# Altium PCB BOOST.PcbDoc
Units mm, origin at the board's own origin, x right, y up, seen from the top; angles counter-clockwise.
Board outline 86.99 x 34.8 mm, 2 copper layers (Top Layer, Bottom Layer), stack 1.581 mm thick; 13 components, 7 nets, 30 pads, 24 vias.
Unrouted connection lines stored in the file: 1.
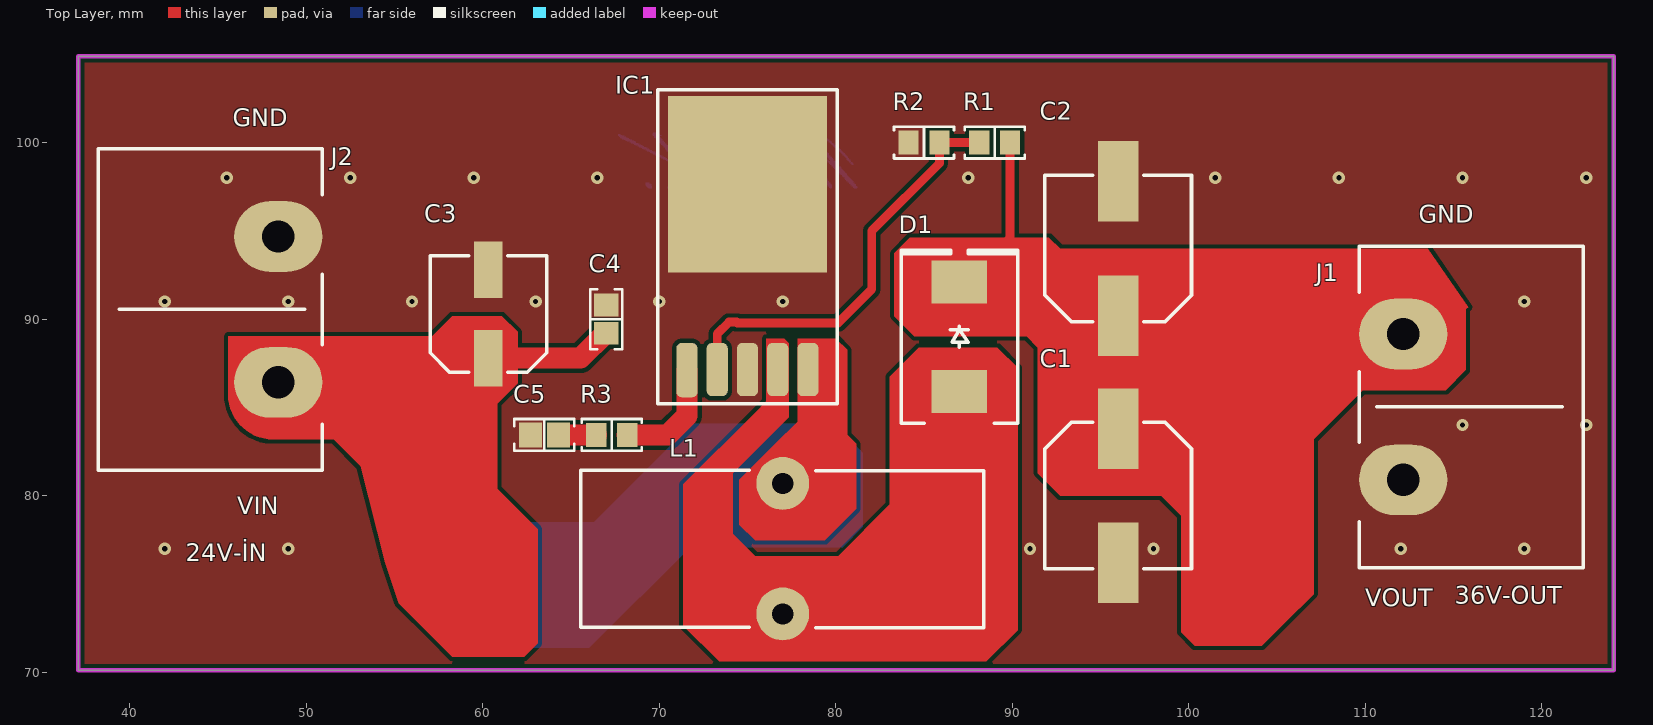
[diagram p0: Top Layer view]
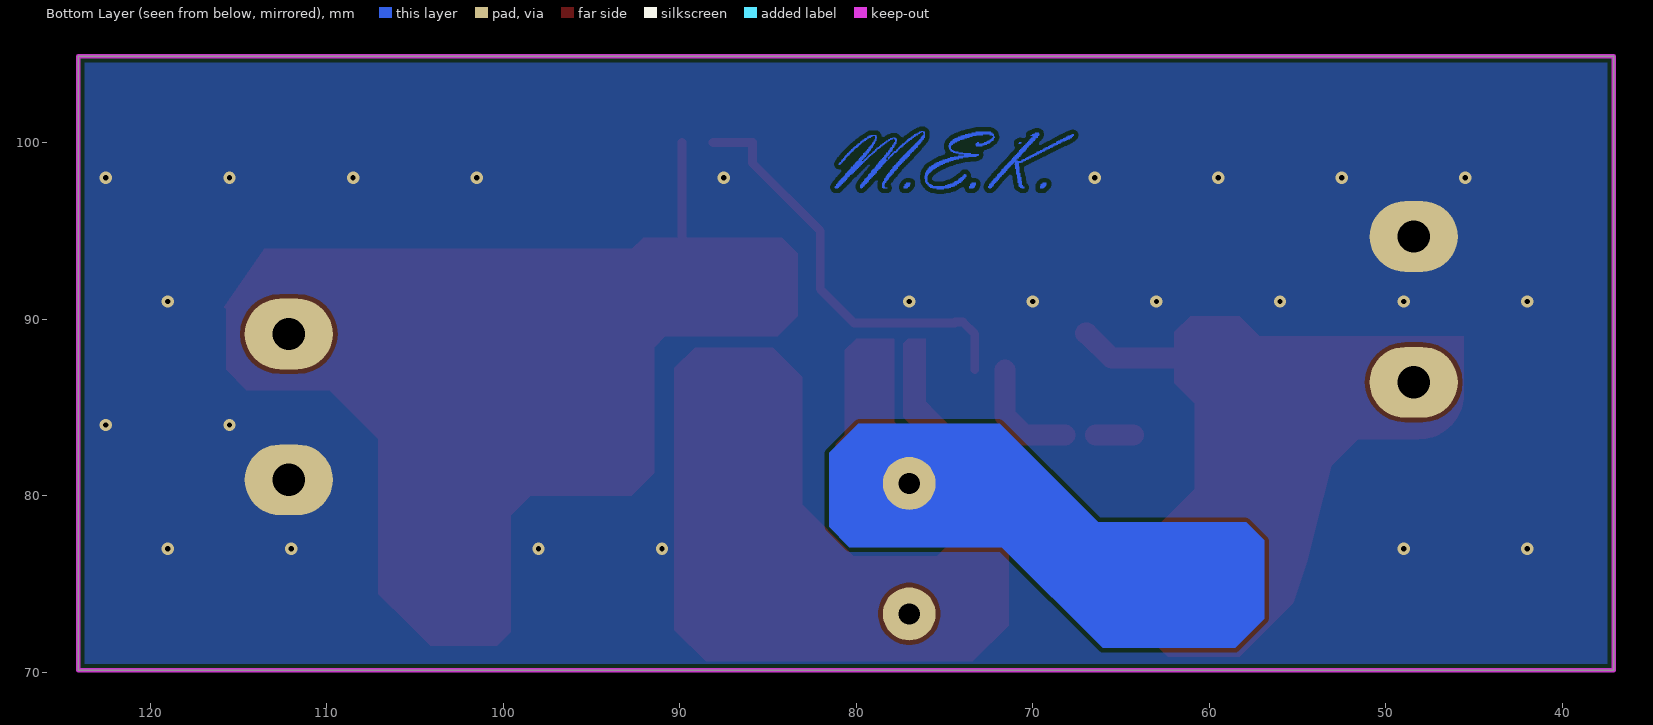
[diagram p1: Bottom Layer view, seen from below]
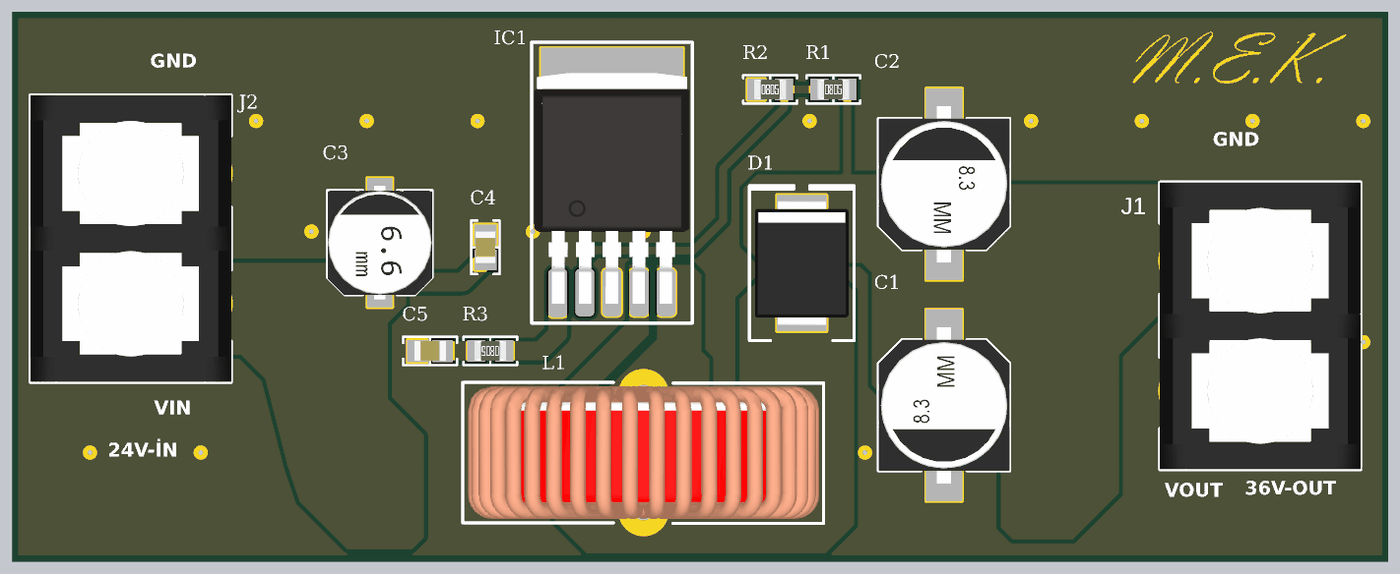
[diagram p2: 3D render of the assembled board from above, using the file's embedded part models]

## Layer stack, top to bottom
Top Solder: solder mask 0.0102, Solder Resist, Dk 3.5
Top Layer: signal copper 0.0356
Dielectric 1: dielectric 1.51, FR-4, Dk 4.8
Bottom Layer: signal copper 0.0356
Bottom Solder: solder mask 0.0102, Solder Resist, Dk 3.5

## Board outline
37.084,70.104 37.084,104.902 124.079,104.902 124.079,70.104

## Design rules (kind name [scope] priority, off if disabled: settings)
Clearance Clearance_1 [InPolygon] p1: gap=0.25 ignorepadtopadclearanceinfootprint=FALSE
Clearance [All] p2: gap=0.152 ignorepadtopadclearanceinfootprint=FALSE
PolygonConnect [All] p1: connectstyle=Direct reliefconductorwidth=0.254 reliefentries=4 polygonreliefangle="90 Angle" airgapwidth=0.254
RoutingVias [All] p1: holewidth=0.5 width=0.8 viastyle="Through Hole" minholewidth=0.3 minwidth=0.5 maxholewidth=1 maxwidth=2
SolderMaskExpansion [All] p1: expansion=0.102 istentingtop=FALSE
Width [All] p1: maxlimit=3 minlimit=0.152 preferedwidth=0.5
30 further rules are at their usual default settings.

## Components (designator, comment, footprint, x,y, rotation, side; value= is the part's Value field where it differs from the comment)
C1 "100µF" "CAP ALSMD 8.3MM H10.5MM" 96,80 r270 top
C2 "100µF" "CAP ALSMD 8.3MM H10.5MM" 96,94 r90 top
C3 "56µF" "CAP ALSMD 6.6MM H7.7MM" 60.325,90.297 r90 top
C4 "0.1µF" "CAP 0805_2012" 67,90 r270 top
C5 "0.68µF" "CAP 0805_2012" 63.5,83.439 r0 top
D1 "SURS8360T3G" "DO214AB SMC" 87,89 r90 top
IC1 "LM2587" D2PAK 75,96 r0 top
J1 "4DB-P108-02" "TE 4DB-P108-02" 115.991,85.026 r270 top
J2 "4DB-P108-02" "TE 4DB-P108-02" 44.577,90.551 r90 top
L1 "100µH" 7447070 77,77 r0 top
R1 "56 kOhms" "RES 0805_2012" 89,100 r0 top
R2 "2 kOhms" "RES 0805_2012" 85,100 r0 top
R3 "3 kOhms" "RES 0805_2012" 67.31,83.439 r180 top

## Footprints (in the part's own frame and the unit in brackets; to place one, negate y for a bottom-side part, rotate by r counter-clockwise, add the part's x,y. Pads: shape width x height; smd on the part's side, far side on the other; paste and mask are expansions set on the pad)
7447070 [mm] "0.984\" Dia x 0.433\" W (25.00mm x 11.00mm)"
  round 3 hole 1.2: 1(0,3.695) 2(0,-3.695)
  silkscreen extent -11.43,-4.49 11.38,4.44, body extent -11.11,-4.19 11.11,4.2, height 22.08
"CAP 0805_2012" [mm] "Chip Capacitor, 2-Leads, Body 2.00x1.20mm, IPC Medium Density"
  rect 1.3x1.4 smd: 1(-0.8,0) 2(0.8,0)
  silkscreen extent -1.7,-0.9 1.7,0.9, body extent -1,-0.64 1,0.64, height 1.26
"CAP ALSMD 6.6MM H7.7MM" [mm] "Aluminum Electrolytic Capacitor, Body 6.60x6.60x7.70mm, IPC Low Density"
  rect 3.2x1.6 smd: 1(-2.5,0) 2(2.5,0)
  silkscreen extent -3.3,-3.3 3.3,3.3, body extent -3.6,-3.3 3.6,3.3, height 7.7
"CAP ALSMD 8.3MM H10.5MM" [mm] "Aluminum Electrolytic Capacitor, Body 8.30x8.30x10.50mm, IPC Low Density"
  rect 4.55x2.3 smd: 1(-3.8,0) 2(3.8,0)
  silkscreen extent -4.15,-4.15 4.15,4.15, body extent -4.95,-4.15 4.95,4.15, height 10.5
D2PAK [mm]
  rrect50% 1.2x3.075 smd: 1(-3.429,-8.89)
  rrect50% 1.2x3.015 smd: 2(-1.714,-8.86) 3(0,-8.86) 4(1.714,-8.86) 5(3.429,-8.86)
  rect 9x10 smd: 3(0,1.651)
  silkscreen extent -5.08,-10.79 5.08,6.98, body extent -4.91,-9.56 4.91,5.04, height 4.22
"DO214AB SMC" [mm] "Molded Diode, 2-Leads, Body 6.85x5.90mm, IPC Medium Density"
  rect 2.45x3.15 smd: 1(-3.1,0) 2(3.1,0)
  silkscreen extent -4.9,-3.3 4.9,3.3, body extent -3.97,-2.95 3.97,2.95, height 2.6
"RES 0805_2012" [mm] "Chip Resistor, 2-Leads, Body 2.00x1.25mm, IPC Medium Density"
  rect 1.15x1.35 smd: 1(-0.875,0) 2(0.875,0)
  silkscreen extent -1.7,-0.9 1.7,0.9, body extent -1,-0.62 1,0.63, height 0.6
"TE 4DB-P108-02" [mm] "Assembly, Dual Barrier 4DB P108"
  oval 4x5 hole 1.829: 1(-4.127,-3.85) 2(4.128,-3.85)
  silkscreen extent -9.1,-6.35 9.1,6.35, body extent -9.08,-6.35 9.08,6.35, height 14.48

## Part data
C1 C2: library part EEE-FK1H101P, "CAP ALUM 100UF 20% 50V SMD", Device Package="Radial, Can - SMD", Lifetime @ Temp.="2000 Hrs @ 105°C", Manufacturer="Panasonic Electronic Components", Operating Temperature="-55°C ~ 105°C", Ratings=AEC-Q200, Ripple Current @ High Frequency="350mA @ 100kHz", Ripple Current @ Low Frequency="262.5mA @ 120Hz", Supplier Part Number 1=PCE3809CT-ND, Tolerance=±20%, Voltage - Rated=50V, Applications=Automotive, Capacitance=100µF, ComponentLink2Description="DigiKey Link", ComponentLink2URL=http://digikey.com/product-detail/en/panasonic-electronic-components/EEE-FK1H101P/PCE3809CT-ND/766185, Height - Seated (Max)="0.413\" (10.50mm)", Impedance="340 mOhms", LastUpdated="2020-09-02 01:25:16", Lifecycle Status=Active, Minimum Order=1, Mounting Type="Surface Mount", Package / Case="Radial, Can - SMD", Packaging=TapeAndReel, Part Number=EEE-FK1H101P, Part Status=Active, PartId=7485, Polarization=Polar, Price=0.25, Series=FK, Size / Dimension="0.315\" Dia (8.00mm)", Supplier 1=DigiKey, Surface Mount Land Size="0.327\" L x 0.327\" W (8.30mm x 8.30mm)"
C3: library part UWD1V560MCL1GS, "CAP ALUM 56UF 20% 35V SMD", Device Package="Radial, Can - SMD", Lifetime @ Temp.="2000 Hrs @ 105°C", Manufacturer=Nichicon, Operating Temperature="-55°C ~ 105°C", Ripple Current @ High Frequency="280mA @ 100kHz", Ripple Current @ Low Frequency="140mA @ 120Hz", Supplier Part Number 1=493-9694-1-ND, Tolerance=±20%, Voltage - Rated=35V, Applications="General Purpose", Capacitance=56µF, ComponentLink1Description=Datasheet, ComponentLink1URL=http://nichicon-us.com/english/products/pdfs/e-uwd.pdf, ComponentLink2Description="DigiKey Link", ComponentLink2URL=http://digikey.com/product-detail/en/nichicon/UWD1V560MCL1GS/493-9694-1-ND/3963026, Height - Seated (Max)="0.303\" (7.70mm)", Impedance="340 mOhms", LastUpdated="2020-09-02 01:25:35", Lifecycle Status=Active, Minimum Order=1, Mounting Type="Surface Mount", Package / Case="Radial, Can - SMD", Packaging=TapeAndReel, Part Number=UWD1V560MCL1GS, Part Status=Active, PartId=8221, Price=0.27, Series=UWD, Size / Dimension="0.248\" Dia (6.30mm)", Supplier 1=DigiKey, Surface Mount Land Size="0.260\" L x 0.260\" W (6.60mm x 6.60mm)"
C4: library part CC0805JRX7R9BB104, "CAP CER 0.1UF 50V X7R 0805", Device Package="0805 (2012 Metric)", Manufacturer=Yageo, Operating Temperature="-55°C ~ 125°C", Supplier Part Number 1=311-1858-1-ND, Temperature Coefficient=X7R, Tolerance=±5%, Voltage - Rated=50V, Applications="General Purpose", Capacitance=0.1µF, ComponentLink1Description=Datasheet, ComponentLink1URL=https://www.yageo.com/upload/media/product/productsearch/datasheet/mlcc/UPY-GPHC_X7R_6.3V-to-50V_18.pdf, ComponentLink2Description="DigiKey Link", ComponentLink2URL=http://digikey.com/product-detail/en/yageo/CC0805JRX7R9BB104/311-1858-1-ND/5195760, LastUpdated="2020-09-02 01:04:41", Lifecycle Status=Active, Minimum Order=1, Mounting Type="Surface Mount, MLCC", Package / Case="0805 (2012 Metric)", Packaging=TapeAndReel, Part Number=CC0805JRX7R9BB104, Part Status=Active, PartId=2626, Price=0.03, Series=CC, Size / Dimension="0.079\" L x 0.049\" W (2.00mm x 1.25mm)", Supplier 1=DigiKey, Thickness (Max)="0.037\" (0.95mm)"
C5: library part C0805C684K5RACTU, "CAP CER 0.68UF 50V X7R 0805", Device Package="0805 (2012 Metric)", Manufacturer=KEMET, Operating Temperature="-55°C ~ 125°C", Supplier Part Number 1=399-8114-1-ND, Temperature Coefficient=X7R, Tolerance=±10%, Voltage - Rated=50V, Applications="Bypass, Decoupling", Capacitance=0.68µF, ComponentLink1Description=Datasheet, ComponentLink1URL=https://api.kemet.com/component-edge/download/datasheet/C0805C684K5RACTU.pdf, ComponentLink2Description="DigiKey Link", ComponentLink2URL=http://digikey.com/product-detail/en/kemet/C0805C684K5RACTU/399-8114-1-ND/3471837, LastUpdated="2020-09-02 01:04:38", Lifecycle Status=Active, Minimum Order=1, Mounting Type="Surface Mount, MLCC", Package / Case="0805 (2012 Metric)", Packaging=TapeAndReel, Part Number=C0805C684K5RACTU, Part Status=Active, PartId=4580, Price=0.07, Series="SMD Comm X7R", Size / Dimension="0.079\" L x 0.049\" W (2.00mm x 1.25mm)", Supplier 1=DigiKey, Thickness (Max)="0.057\" (1.45mm)"
D1: "DIODE GEN PURP 600V 3A SMC", Current - Average Rectified (Io)=3A, Current - Reverse Leakage @ Vr="10µA @ 600V", Manufacturer="ON Semiconductor", Operating Temperature - Junction="-65°C ~ 175°C", Package / Case="DO-214AB, SMC", Supplier Device Package=SMC, Supplier Part Number 1=SURS8360T3GOSCT-ND, Voltage - DC Reverse (Vr) (Max)=600V, Voltage - Forward (Vf) (Max) @ If="1.25V @ 3A", ComponentLink1Description=Datasheet, ComponentLink1URL=http://www.onsemi.com/pub/Collateral/MURS320T3-D.PDF, ComponentLink2Description="DigiKey Link", ComponentLink2URL=http://digikey.com/product-detail/en/on-semiconductor/SURS8360T3G/SURS8360T3GOSCT-ND/9087771, Diode Type=Standard, LastUpdated="2020-09-02 01:18:57", Lifecycle Status=Active, Minimum Order=1, Mounting Type="Surface Mount", Packaging=TapeAndReel, Part Number=SURS8360T3G, Part Status=Active, PartId=348, Price=0.30, Reverse Recovery Time (trr)=75ns, Series=-, Speed="Fast Recovery =< 500ns, > 200mA (Io)", Supplier 1=DigiKey
IC1: "Boost Converter"
J1 J2: "CONN BARRIER STRIP 2CIRC 0.325\"", Color=Black, Current Rating (Amps)=20A, Manufacturer="TE Connectivity AMP Connectors", Supplier Part Number 1=A98472-ND, Voltage Rating=150V, Barrier Type="2 Wall (Dual)", Bottom Termination="PC Pin", ComponentLink1Description=Datasheet, ComponentLink1URL=https://www.te.com/commerce/DocumentDelivery/DDEController?Action=srchrtrv&DocNm=2-1437667-4&DocType=Customer+Drawing&DocLang=English, ComponentLink2Description="DigiKey Link", ComponentLink2URL=http://digikey.com/product-detail/en/te-connectivity-amp-connectors/4DB-P108-02/A98472-ND/1277921, LastUpdated="15.01.2020 04:14:08", Lifecycle Status=Active, Minimum Order=1, Number of Circuits=2, Number of Rows=1, Number of Wire Entries=2, Packaging=Bulk, Part Number=4DB-P108-02, Part Status=Active, Pitch="0.325\" (8.26mm)", Price=1.04, Series="4DB, Buchanan", Supplier 1=DigiKey, Terminal Block Type="Barrier Block", Top Termination="Screws with Captive Plate", Wire Gauge="12-22 AWG"
L1: library part SRR1280-101M, "FIXED IND 100UH 2.1A 150MOHM SMD", Current - Saturation=2A, Current Rating (Amps)=2.1A, DC Resistance (DCR)="150mOhm Max", Device Package=Nonstandard, Frequency - Self Resonant=4.5MHz, Inductance Frequency - Test=100kHz, Manufacturer="Bourns Inc.", Operating Temperature="-40°C ~ 125°C", Q @ Freq="18 @ 796kHz", Supplier Part Number 1=SRR1280-101MCT-ND, Tolerance=±20%, ComponentLink1Description=Datasheet, ComponentLink1URL=https://www.bourns.com/docs/Product-Datasheets/SRR1280.pdf, ComponentLink2Description="DigiKey Link", ComponentLink2URL=http://digikey.com/product-detail/en/bourns-inc/SRR1280-101M/SRR1280-101MCT-ND/2127046, Height - Seated (Max)="0.315\" (8.00mm)", Inductance=100µH, LastUpdated="2020-09-02 01:22:09", Lifecycle Status=Active, Material - Core=Ferrite, Minimum Order=1, Mounting Type="Surface Mount", Package / Case=Nonstandard, Packaging=TapeAndReel, Part Number=SRR1280-101M, Part Status=Active, PartId=24, Price=0.65, Series=SRR1280, Shielding=Shielded, Size / Dimension="0.492\" L x 0.492\" W (12.50mm x 12.50mm)", Supplier 1=DigiKey, Type=Wirewound
R1: library part RMCF0805FT56K0, "RES 56K OHM 1% 1/8W 0805", Device Package="0805 (2012 Metric)", Manufacturer="Stackpole Electronics Inc", Operating Temperature="-55°C ~ 155°C", Power (Watts)="0.125W, 1/8W", Ratings=AEC-Q200, Supplier Device Package=0805, Supplier Part Number 1=RMCF0805FT56K0CT-ND, Temperature Coefficient=±100ppm/°C, Tolerance=±1%, ComponentLink1Description=Datasheet, ComponentLink1URL=https://www.seielect.com/catalog/sei-packaging.pdf, ComponentLink2Description="DigiKey Link", ComponentLink2URL=http://digikey.com/product-detail/en/stackpole-electronics-inc/RMCF0805FT56K0/RMCF0805FT56K0CT-ND/5049802, Composition="Thick Film", Features="Automotive AEC-Q200", Height - Seated (Max)="0.026\" (0.65mm)", LastUpdated="2020-09-02 01:15:14", Lifecycle Status=Active, Minimum Order=1, Number of Terminations=2, Package / Case="0805 (2012 Metric)", Packaging=CutTape, Part Number=RMCF0805FT56K0, Part Status=Active, PartId=32591, Price=0.10, Resistance="56 kOhms", Series=RMCF, Size / Dimension="0.079\" L x 0.049\" W (2.00mm x 1.25mm)", Supplier 1=DigiKey
R2: library part AC0805FR-072KL, "RES SMD 2K OHM 1% 1/8W 0805", Device Package="0805 (2012 Metric)", Manufacturer=Yageo, Operating Temperature="-55°C ~ 155°C", Power (Watts)="0.125W, 1/8W", Ratings=AEC-Q200, Supplier Device Package=0805, Supplier Part Number 1=YAG3718CT-ND, Temperature Coefficient=±100ppm/°C, Tolerance=±1%, ComponentLink1Description=Datasheet, ComponentLink1URL=https://www.yageo.com/upload/media/product/productsearch/datasheet/rchip/PYu-AC_51_RoHS_L_7.pdf, ComponentLink2Description="DigiKey Link", ComponentLink2URL=http://digikey.com/product-detail/en/yageo/AC0805FR-072KL/YAG3718CT-ND/6006567, Composition="Thick Film", Features="Automotive AEC-Q200, Moisture Resistant", Height - Seated (Max)="0.024\" (0.60mm)", LastUpdated="2020-09-02 01:15:09", Lifecycle Status=Active, Minimum Order=1, Number of Terminations=2, Package / Case="0805 (2012 Metric)", Packaging=TapeAndReel, Part Number=AC0805FR-072KL, Part Status=Active, PartId=34654, Price=0.01, Resistance="2 kOhms", Series=AC, Size / Dimension="0.079\" L x 0.049\" W (2.00mm x 1.25mm)", Supplier 1=DigiKey
R3: library part ERJ-6ENF3001V, "RES SMD 3K OHM 1% 1/8W 0805", Device Package="0805 (2012 Metric)", Manufacturer="Panasonic Electronic Components", Operating Temperature="-55°C ~ 155°C", Power (Watts)="0.125W, 1/8W", Ratings=AEC-Q200, Supplier Device Package=0805, Supplier Part Number 1=P3.0KCCT-ND, Temperature Coefficient=±100ppm/°C, Tolerance=±1%, ComponentLink1Description=Datasheet, ComponentLink1URL=https://industrial.panasonic.com/cdbs/www-data/pdf/RDA0000/AOA0000C304.pdf, ComponentLink2Description="DigiKey Link", ComponentLink2URL=http://digikey.com/product-detail/en/panasonic-electronic-components/ERJ-6ENF3001V/P3.0KCCT-ND/1746847, Composition="Thick Film", Features="Automotive AEC-Q200", Height - Seated (Max)="0.028\" (0.70mm)", LastUpdated="2020-09-02 01:15:19", Lifecycle Status=Active, Minimum Order=1, Number of Terminations=2, Package / Case="0805 (2012 Metric)", Packaging=TapeAndReel, Part Number=ERJ-6ENF3001V, Part Status=Active, PartId=30109, Price=0.01, Resistance="3 kOhms", Series=ERJ, Size / Dimension="0.079\" L x 0.049\" W (2.00mm x 1.25mm)", Supplier 1=DigiKey

## Via types
v1: diameter 0.7, hole 0.3, Top Layer to Bottom Layer, 24 vias

## Nets (pads, with @x,y where several pads share a name; then routed paths per layer and width w, separated by ;. In a path a pad name is that pad's centre, name@x,y a point inside that pad or via, vN(x,y) a via of type N, cw(c..) or ccw(c..) an arc to the next point about the centre after c; other vN are vias at no path point)
GND: C1.2 C2.2 C3.2 C4.1 C5.1 IC1.3 J1.2 J2.2 R2.1
  other v1: 42,77 49,77 91,77 98,77 112,77 119,77 115.5,84 122.5,84 42,91 49,91 56,91 63,91 70,91 77,91 119,91 45.5,98 52.5,98 59.5,98 66.5,98 87.5,98 101.5,98 108.5,98 115.5,98 122.5,98
NetC5_2: C5.2 R3.2 | length 2.1
  Top Layer w1.2: C5.2 R3.2
NetD1_1: D1.1 IC1.4 L1.2
NetR1_1: IC1.2 R1.1 R2.2 | length 24
  Top Layer w0.5: IC1.2 73.285,89.16 73.961,89.836 74.375,89.836 74.422,89.789 80.137,89.789 82.042,91.694 82.042,94.996 85.875,98.829 R2.2 R1.1
NetR3_1: IC1.1 R3.1 | length 6.4
  Top Layer w1.2: R3.1 70.485,83.439 71.571,84.525 IC1.1
VIN: C3.1 C4.2 IC1.5 J2.1 L1.1 | length 7.3
  Top Layer w1.2: C3.1 65.547,87.797 66.95,89.2 C4.2
VOUT: C1.1 C2.1 D1.2 J1.1 R1.2 | length 9.3
  Top Layer w0.5: D1.2 87.35,92.1 89.875,94.625 R1.2

## Polygon pours and split planes (outlines as drawn)
GND on Top Layer "NONET_L-01_P-001" (solid, pour order 0): 124.079,104.902 124.079,70.104 37.084,70.104 37.084,104.902
GND on Bottom Layer "NONET_L-01_P-001" (solid, pour order 1): 123.695,104.518 123.695,70.104 37.084,70.104 37.084,105.156 37.338,105.156

## Keep-outs
Keep-Out Layer:
  the board outline again, w0.254

## Other copper
Top Layer:
  region net VIN: 45.593,89.027 45.593,85.725 ccw(c48.133,85.725) 48.133,83.185 51.562,83.185 53.086,81.661 54.483,76.2 55.245,73.914 57.15,72.009 57.15,89.027
  region net VOUT: 113.03,93.98 113.538,93.98 115.824,90.678 115.697,90.551 115.697,87.122 114.554,85.979 109.855,85.979 107.061,83.185 107.061,74.422 105.41,72.771 105.41,86.36 97.79,93.98
  region net VOUT: 100.33,91.44 105.41,86.36 105.41,72.771 104.14,71.501 100.33,71.501 99.568,72.263 99.568,78.867 98.425,80.01 98.425,87.63
  region net VIN: 57.15,89.027 58.293,90.17 61.087,90.17 61.976,89.281 61.976,86.36 60.833,85.217 60.833,80.391 63.119,78.105 63.119,71.628 62.357,70.866 58.293,70.866 57.15,72.009
  region net NetD1_1: 76.073,88.9 77.089,88.9 77.343,88.646 77.343,84.455 74.168,81.28 74.168,77.851 75.438,76.581 80.137,76.581 83.058,79.502 83.058,86.741 84.709,88.392 89.154,88.392 90.297,87.249 90.297,72.39 88.519,70.612 73.406,70.612 71.374,72.644 71.374,80.645 75.438,84.709 76.073,85.344
  region net VIN: 77.851,88.9 80.01,88.9 80.645,88.265 80.645,83.439 81.153,82.931 81.153,79.248 79.375,77.47 75.438,77.47 74.549,78.359 74.549,80.899 76.581,82.931 77.851,84.201
  region net VOUT: 92.075,94.615 92.71,93.98 97.79,93.98 100.33,91.44 100.33,81.915 98.425,80.01 92.71,80.01 91.44,81.28 91.44,88.392 90.805,89.027 84.455,89.027 83.312,90.17 83.312,93.726 84.201,94.615
Bottom Layer:
  region: 70.669,99.97 70.714,99.97 70.714,99.925 70.804,99.925 70.804,99.97 70.759,99.97 70.759,100.015 70.669,100.015
  region: 69.226,97.67 69.226,97.625 69.226,97.58 69.271,97.58 69.271,97.535 69.316,97.535 69.316,97.49 69.361,97.49 69.361,97.445 69.406,97.445 69.406,97.4 69.586,97.4 69.586,97.445 69.586,97.49 69.586,97.535 69.541,97.535 69.541,97.58 69.541,97.625 69.496,97.625 69.496,97.67 69.451,97.67 69.451,97.715 69.226,97.715
  region: 378 vertices and 0 holes, not listed, extent 72.157,97.355 76.125,100.602
  region: 73.239,97.67 73.239,97.625 73.239,97.58 73.284,97.58 73.284,97.535 73.284,97.49 73.329,97.49 73.329,97.445 73.374,97.445 73.374,97.4 73.6,97.4 73.6,97.445 73.6,97.49 73.6,97.535 73.555,97.535 73.555,97.58 73.555,97.625 73.51,97.625 73.51,97.67 73.465,97.67 73.465,97.715 73.239,97.715
  region: 484 vertices and 0 holes, not listed, extent 67.692,97.4 72.518,100.556
  region: 226 vertices and 0 holes, not listed, extent 77.704,97.4 79.778,100.286
  region: 76.937,97.67 76.937,97.625 76.982,97.625 76.982,97.58 76.982,97.535 77.027,97.535 77.027,97.49 77.072,97.49 77.072,97.445 77.118,97.445 77.118,97.4 77.298,97.4 77.298,97.445 77.298,97.49 77.298,97.535 77.253,97.535 77.253,97.58 77.253,97.625 77.208,97.625 77.208,97.67 77.163,97.67 77.163,97.715 76.937,97.715
  region: 80.861,98.843 80.861,98.798 80.906,98.798 80.906,98.753 80.996,98.753 80.996,98.798 80.951,98.798 80.951,98.843 80.906,98.843 80.906,98.888 80.861,98.888
  region: 254 vertices and 0 holes, not listed, extent 76.125,97.4 78.516,100.647
  region: 76.306,100.556 76.396,100.556 76.396,100.511 76.486,100.511 76.486,100.466 76.531,100.466 76.531,100.421 76.621,100.421 76.621,100.376 76.667,100.376 76.667,100.331 76.757,100.331 76.757,100.286 76.802,100.286 76.802,100.241 76.847,100.241 76.847,100.196 76.892,100.196 76.892,100.151 76.982,100.151 76.982,100.106 77.027,100.106 77.027,100.06 77.072,100.06 77.072,100.015 77.163,100.015 77.163,99.97 77.208,99.97 77.208,99.925 77.253,99.925 77.253,99.88 77.298,99.88 77.298,99.835 77.343,99.835 77.343,99.79 77.388,99.79 77.388,99.745 77.478,99.745 77.478,99.7 77.523,99.7 77.523,99.655 77.568,99.655 77.568,99.609 77.614,99.609 77.614,99.564 77.659,99.564 77.659,99.519 77.704,99.519 77.704,99.474 77.749,99.474 77.749,99.429 77.839,99.429 77.839,99.384 77.884,99.384 77.884,99.339 77.929,99.339 77.929,99.294 77.974,99.294 77.974,99.249 78.019,99.249 78.019,99.204 78.065,99.204 78.065,99.158 78.11,99.158 78.11,99.113 78.155,99.113 78.155,99.068 78.2,99.068 78.2,99.113 78.2,99.158 78.155,99.158 78.155,99.204 78.11,99.204 78.11,99.249 78.065,99.249 78.065,99.294 78.019,99.294 78.019,99.339 77.974,99.339 77.974,99.384 77.929,99.384 77.929,99.429 77.884,99.429 77.884,99.474 77.839,99.474 77.839,99.519 77.749,99.519 77.749,99.564 77.704,99.564 77.704,99.609 77.659,99.609 77.659,99.655 77.614,99.655 77.614,99.7 77.568,99.7 77.568,99.745 77.523,99.745 77.523,99.79 77.478,99.79 77.478,99.835 77.433,99.835 77.433,99.88 77.388,99.88 77.388,99.925 77.298,99.925 77.298,99.97 77.253,99.97 77.253,100.015 77.208,100.015 77.208,100.06 77.163,100.06 77.163,100.106 77.118,100.106 77.118,100.151 77.072,100.151 77.072,100.196 77.027,100.196 77.027,100.241 76.937,100.241 76.937,100.286 76.892,100.286 76.892,100.331 76.802,100.331 76.802,100.376 76.757,100.376 76.757,100.421 76.712,100.421 76.712,100.466 76.621,100.466 76.621,100.511 76.531,100.511 76.531,100.556 76.441,100.556 76.441,100.602 76.306,100.602
  region: 406 vertices and 0 holes, not listed, extent 78.831,97.4 81.221,100.421
  region: 77.929,100.196 78.019,100.196 78.019,100.151 78.11,100.151 78.11,100.106 78.155,100.106 78.155,100.06 78.245,100.06 78.245,100.015 78.29,100.015 78.29,99.97 78.38,99.97 78.38,99.925 78.425,99.925 78.425,99.88 78.47,99.88 78.47,99.835 78.516,99.835 78.516,99.79 78.606,99.79 78.606,99.745 78.651,99.745 78.651,99.7 78.696,99.7 78.696,99.655 78.786,99.655 78.786,99.609 78.831,99.609 78.831,99.564 78.876,99.564 78.876,99.519 78.921,99.519 78.921,99.474 78.966,99.474 78.966,99.429 79.012,99.429 79.012,99.384 79.057,99.384 79.057,99.339 79.147,99.339 79.147,99.384 79.102,99.384 79.102,99.429 79.057,99.429 79.057,99.474 79.012,99.474 79.012,99.519 78.966,99.519 78.966,99.564 78.921,99.564 78.921,99.609 78.876,99.609 78.876,99.655 78.831,99.655 78.831,99.7 78.741,99.7 78.741,99.745 78.696,99.745 78.696,99.79 78.651,99.79 78.651,99.835 78.606,99.835 78.606,99.88 78.516,99.88 78.516,99.925 78.47,99.925 78.47,99.97 78.425,99.97 78.425,100.015 78.335,100.015 78.335,100.06 78.29,100.06 78.29,100.106 78.2,100.106 78.2,100.151 78.155,100.151 78.155,100.196 78.065,100.196 78.065,100.241 77.929,100.241
  region net VIN: 57.912,78.486 66.294,78.486 71.882,84.074 79.883,84.074 81.534,82.423 81.534,78.232 80.391,77.089 71.755,77.089 66.04,71.374 58.547,71.374 56.896,73.025 56.896,77.47

## Silkscreen, mask and mechanical layers (free items; w line width, h text height)
Top Overlay:
  text "GND" at 45.847,100.584 h1.7
  text "GND" at 113.03,95.123 h1.7
  text "VIN" at 46.101,78.613 h1.7
  text "24V-İN" at 43.18,75.946 h1.7
  text "36V-OUT" at 115.062,73.533 h1.7
  text "VOUT" at 109.982,73.406 h1.7
Top Solder:
  drawing of 12 lines, arcs and shapes, not listed
Bottom Solder:
  drawing of 12 lines, arcs and shapes, not listed